# Altium PCB tsal_v1.PcbDoc
Units mm, origin at the board's own origin, x right, y up, seen from the top; angles counter-clockwise.
Board outline 175 x 18 mm, 2 copper layers (Top Layer, Bottom Layer); 41 components, 36 nets, 90 pads, 0 vias.
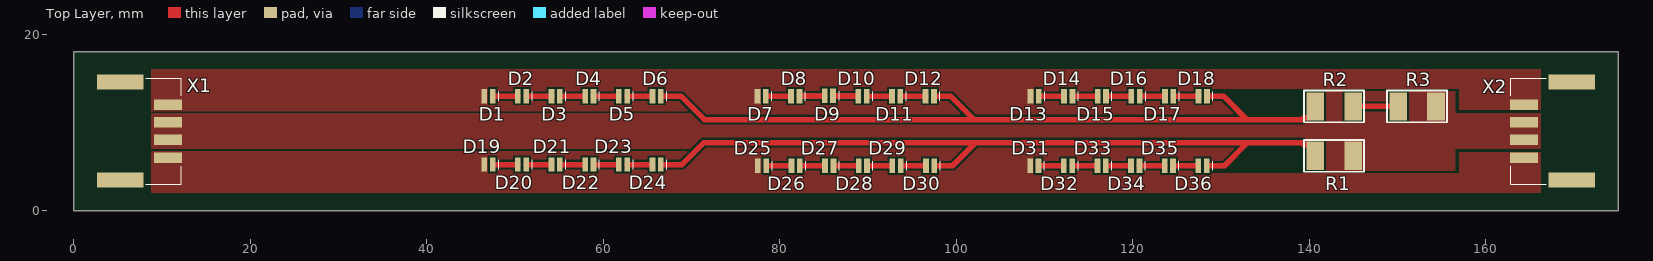
[diagram p0: Top Layer view]
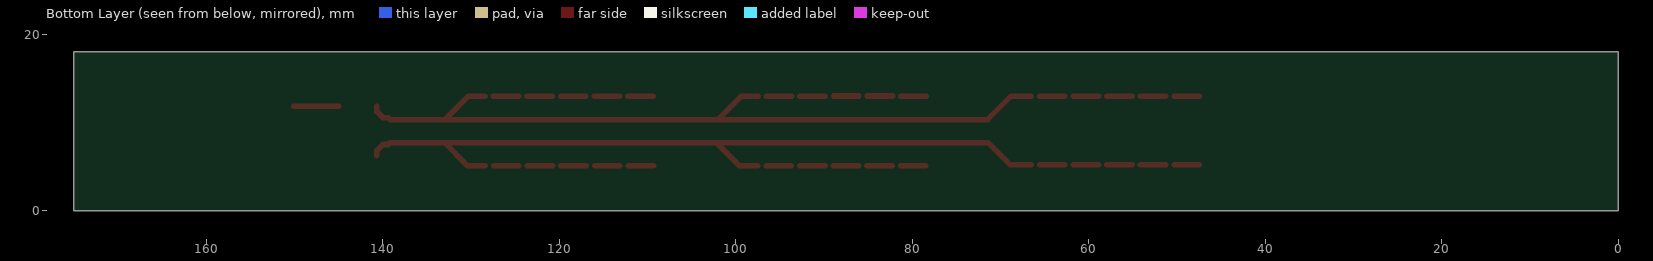
[diagram p1: Bottom Layer view, seen from below]

## Layer stack, top to bottom
Top Solder: solder mask 0.0102, Solder Resist, Dk 3.5
Top Layer: signal copper 0.0356
Dielectric 1: dielectric 0.32, FR-4, Dk 4.8
Bottom Layer: signal copper 0.0356
Bottom Solder: solder mask 0.0102, Solder Resist, Dk 3.5

## Board outline
0,0 175,0 175,18 0,18

## Design rules (kind name [scope] priority, off if disabled: settings)
Clearance Clearance_GND [InNamedPolygon('GND')] p1: gap=0.254 ignorepadtopadclearanceinfootprint=FALSE except(0: Arc-Hole Track-Hole SMDPad-Hole THPad-Hole Via-Hole Fill-Hole Poly-Hole Region-Hole Text-Hole)
Clearance [All] p2: gap=0.254 ignorepadtopadclearanceinfootprint=FALSE except(0: Arc-Hole Track-Hole SMDPad-Hole THPad-Hole Via-Hole Fill-Hole Poly-Hole Region-Hole Text-Hole)
MinimumSolderMaskSliver [All] p1: minsoldermaskwidth=0.095
PolygonConnect [All] p1: connectstyle=Direct reliefconductorwidth=0.254 reliefentries=4 polygonreliefangle="90 Angle" airgapwidth=0.254
RoomDefinition tsal_v1 [InComponentClass('tsal_v1')] p1 off: confinementstyle=ConfineIn formatcopy=TRUE lockcomponents=FALSE outline 1,1 174,1 174,17 1,17
RoutingVias [All] p1: holewidth=0.711 width=1.27 viastyle="Through Hole" minholewidth=0.711 minwidth=1.27 maxholewidth=0.711 maxwidth=1.27
SilkToSolderMaskClearance [IsPad] p1: minsilkscreentomaskgap=0.1 clearancetoexposedcopper=TRUE
SolderMaskExpansion SolderMaskExpansion_led [HasFootprint('led red 0606')] p1: expansion=0
SolderMaskExpansion [All] p2: expansion=0.102
Width [All] p1: maxlimit=0.635 minlimit=0.635 preferedwidth=0.635
28 further rules are at their usual default settings.

## Components (designator, comment, footprint, x,y, rotation, side; value= is the part's Value field where it differs from the comment)
D1 "LED XLAMP RED 1616 SMD" "led red 0606" 46.99,12.954 r0 top
D2 "LED XLAMP RED 1616 SMD" "led red 0606" 50.8,12.954 r0 top
D3 "LED XLAMP RED 1616 SMD" "led red 0606" 54.61,12.954 r0 top
D4 "LED XLAMP RED 1616 SMD" "led red 0606" 58.42,12.954 r0 top
D5 "LED XLAMP RED 1616 SMD" "led red 0606" 62.23,12.954 r0 top
D6 "LED XLAMP RED 1616 SMD" "led red 0606" 66.04,12.954 r0 top
D7 "LED XLAMP RED 1616 SMD" "led red 0606" 77.945,12.954 r0 top
D8 "LED XLAMP RED 1616 SMD" "led red 0606" 81.755,12.954 r0 top
D9 "LED XLAMP RED 1616 SMD" "led red 0606" 85.565,13 r0 top
D10 "LED XLAMP RED 1616 SMD" "led red 0606" 89.375,12.954 r0 top
D11 "LED XLAMP RED 1616 SMD" "led red 0606" 93.185,12.954 r0 top
D12 "LED XLAMP RED 1616 SMD" "led red 0606" 96.995,12.954 r0 top
D13 "LED XLAMP RED 1616 SMD" "led red 0606" 108.872,12.954 r0 top
D14 "LED XLAMP RED 1616 SMD" "led red 0606" 112.682,12.954 r0 top
D15 "LED XLAMP RED 1616 SMD" "led red 0606" 116.492,12.954 r0 top
D16 "LED XLAMP RED 1616 SMD" "led red 0606" 120.302,12.954 r0 top
D17 "LED XLAMP RED 1616 SMD" "led red 0606" 124.112,12.954 r0 top
D18 "LED XLAMP RED 1616 SMD" "led red 0606" 127.922,12.954 r0 top
D19 "LED XLAMP GREEN 1616 SMD" "led red 0606" 46.99,5.207 r0 top
D20 "LED XLAMP GREEN 1616 SMD" "led red 0606" 50.8,5.207 r0 top
D21 "LED XLAMP GREEN 1616 SMD" "led red 0606" 54.61,5.207 r0 top
D22 "LED XLAMP GREEN 1616 SMD" "led red 0606" 58.42,5.207 r0 top
D23 "LED XLAMP GREEN 1616 SMD" "led red 0606" 62.23,5.207 r0 top
D24 "LED XLAMP GREEN 1616 SMD" "led red 0606" 66.04,5.207 r0 top
D25 "LED XLAMP GREEN 1616 SMD" "led red 0606" 77.978,5.08 r0 top
D26 "LED XLAMP GREEN 1616 SMD" "led red 0606" 81.788,5.08 r0 top
D27 "LED XLAMP GREEN 1616 SMD" "led red 0606" 85.598,5.08 r0 top
D28 "LED XLAMP GREEN 1616 SMD" "led red 0606" 89.408,5.08 r0 top
D29 "LED XLAMP GREEN 1616 SMD" "led red 0606" 93.218,5.08 r0 top
D30 "LED XLAMP GREEN 1616 SMD" "led red 0606" 97.028,5.08 r0 top
D31 "LED XLAMP GREEN 1616 SMD" "led red 0606" 108.839,5.08 r0 top
D32 "LED XLAMP GREEN 1616 SMD" "led red 0606" 112.649,5.08 r0 top
D33 "LED XLAMP GREEN 1616 SMD" "led red 0606" 116.459,5.08 r0 top
D34 "LED XLAMP GREEN 1616 SMD" "led red 0606" 120.269,5.08 r0 top
D35 "LED XLAMP GREEN 1616 SMD" "led red 0606" 124.079,5.08 r0 top
D36 "LED XLAMP GREEN 1616 SMD" "led red 0606" 127.889,5.08 r0 top
R1 "RES SMD 6.8 OHM 1% 16W 2512" "R2512 pad under" 142.8,6.2 r180 top value=6.8R
R2 "RES SMD 10 OHM 1% 16W 2512" "R2512 pad under" 142.8,11.8 r180 top value=10R
R3 "RES SMD 10 OHM 1% 16W 2512" "R2512 pad under" 152.2,11.8 r180 top value=10R
X1 "Connector" 5023520400 10.69,11.001 r270 top
X2 "Connector" 5023520400 164.31,7.001 r90 top

## Footprints (in the part's own frame and the unit in brackets; to place one, negate y for a bottom-side part, rotate by r counter-clockwise, add the part's x,y. Pads: shape width x height; smd on the part's side, far side on the other; paste and mask are expansions set on the pad)
5023520400 [mm] "Molex DuraClik, 4 pos, Right Angle"
  rect 1.7x5.3 smd mask+0: 0(-3.55,-5.4) 0(7.55,-5.4)
  rect 1.2x3.2 smd mask+0: 1(-1,0) 2(1,0) 3(3,0) 4(5,0)
  silkscreen extent -4,-2.5 8,1.5, body extent -4,-10.69 8,1, height 6.8
"led red 0606" [mm]
  rect 0.65x1.6 smd: 1(-0.475,0) 2(0.475,0)
  silkscreen extent 1.14,-0.53 1.14,0.53, body extent -0.8,-0.8 0.8,0.8, height 1.09
"R2512 pad under" [mm]
  rect 2x3.2 smd: 1(-2.15,0) 2(2.15,0)
  silkscreen extent -3.4,-1.8 3.4,1.8, body extent -3.05,-1.52 3.05,1.52, height 0.7

## Part data
D1 D2 D3 D4 D5 D6 D7 D8 D9 D10 D11 D12 D13 D14 D15 D16 D17 D18: library part XQARED-02-0000-000000W01, "LED Lighting Color Xlamp® XQ-A Red 625nm (620nm ~ 630nm) 0606 (1616 Metric)", Manufacturer="Comchip Technology", Supplier Part Number 1=XQARED-02-0000-000000W01CT-ND, Part_Number=XQARED-02-0000-000000W01, Price=0.81, Price_10=0.762, Supplier 1=Digi-Key, Supplier_Link=https://www.digikey.ca/product-detail/en/cree-inc/XQARED-02-0000-000000W01/XQARED-02-0000-000000W01CT-ND/5806748
D19 D20 D21 D22 D23 D24 D25 D26 D27 D28 D29 D30 D31 D32 D33 D34 D35 D36: library part XQAGRN-02-0000-000000Z01, "LED Lighting Color Xlamp® XQ-A Green 528nm (520nm ~ 535nm) 0606 (1616 Metric)", Manufacturer="Comchip Technology", Supplier Part Number 1=XQAGRN-02-0000-000000Z01CT-ND, Part_Number=XQAGRN-02-0000-000000Z01, Price=0.87, Price_10=0.817, Supplier 1=Digi-Key, Supplier_Link=https://www.digikey.ca/product-detail/en/cree-inc/XQAGRN-02-0000-000000Z01/XQAGRN-02-0000-000000Z01CT-ND/5806746
R1: library part "RES 2512 6.8R 1% 16W", "6.8 Ohms ±1% 16W Chip Resistor 2512 (6432 Metric) Moisture Resistant Thin Film", Manufacturer=Susumu, Power=16W, Supplier Part Number 1=CPA25Q6.8CT-ND, Tolerance=1%, Part_Number=CPA25Q6.8CT, Supplier 1=Digi-Key, Supplier_Link=https://www.digikey.com/product-detail/en/susumu/CPA2512Q6R80FS-T10/CPA25Q6.8CT-ND/1935961
R2 R3: library part "RES 2512 10R 1% 16W", "10 Ohms ±1% 16W Chip Resistor 2512 (6432 Metric) Moisture Resistant Thin Film", Manufacturer=Susumu, Power=16W, Supplier Part Number 1=CPA25Q10.0CT-ND, Tolerance=1%, Part_Number=CPA25Q10.0CT, Supplier 1=Digi-Key, Supplier_Link=https://www.digikey.com/product-detail/en/susumu/CPA2512Q10R0FS-T10/CPA25Q10.0CT-ND/1935963
X1 X2: library part 5023520400, "Molex DuraClik, 4 pos, RA", Manufacturer=Molex, Supplier Part Number 1=WM7171CT-ND, Mounting_Type="Surface Mount, Right Angle", Part_Number=5023520400, Part_Number_Crimp=0502128000, Part_Number_Mating=5023510400, Series=DuraClik, Supplier 1=Digikey, Supplier_Link=http://www.digikey.com/product-detail/en/molex-llc/5023520400/WM7171CT-ND/3045198, Supplier_Link_Crimp=http://www.digikey.com/product-detail/en/molex-llc/0502128000/WM4561CT-ND/2524899, Supplier_Link_Mating=http://www.digikey.com/product-detail/en/molex-llc/5023510400/WM8688-ND/3045219

## Nets (pads, with @x,y where several pads share a name; then routed paths per layer and width w, separated by ;. In a path a pad name is that pad's centre, name@x,y a point inside that pad or via, vN(x,y) a via of type N, cw(c..) or ccw(c..) an arc to the next point about the centre after c; other vN are vias at no path point)
"24V GREEN": D19.1 D25.1 D31.1 X1.4 X2.1
"24V RED": D1.1 D7.1 D13.1 X1.1 X2.4
GND: R1.1 R3.1 X1.2 X1.3 X2.2 X2.3
NetD1_2: D1.2 D2.1 | length 2.9
  Top Layer w0.635: D1.2 D2.1
NetD2_2: D2.2 D3.1 | length 2.9
  Top Layer w0.635: D2.2 D3.1
NetD3_2: D3.2 D4.1 | length 2.9
  Top Layer w0.635: D3.2 D4.1
NetD4_2: D4.2 D5.1 | length 2.9
  Top Layer w0.635: D4.2 D5.1
NetD5_2: D5.2 D6.1 | length 2.9
  Top Layer w0.635: D5.2 D6.1
NetD6_2: D6.2 D12.2 D18.2 R2.2 | length 87.4
  Top Layer w0.635: D6.2 68.8,12.954 71.454,10.3 102,10.3 ; D12.2 99.346,12.954 102,10.3 ; D18.2 130.246,12.954 132.9,10.3 ; R2.2 140.65,11.2 139.967,10.517 139.367,10.517 139.15,10.3 132.9,10.3 ; 102,10.3 132.9,10.3
NetD7_2: D7.2 D8.1 | length 2.9
  Top Layer w0.635: D7.2 D8.1
NetD8_2: D8.2 D9.1 | length 2.9
  Top Layer w0.635: D8.2 82.23,12.97 82.238,12.977 85.082,12.977 85.09,12.985 D9.1
NetD9_2: D9.2 D10.1 | length 2.9
  Top Layer w0.635: D9.2 86.04,12.985 86.048,12.977 88.892,12.977 88.9,12.97 D10.1
NetD10_2: D10.2 D11.1 | length 2.9
  Top Layer w0.635: D10.2 D11.1
NetD11_2: D11.2 D12.1 | length 2.9
  Top Layer w0.635: D11.2 D12.1
NetD13_2: D13.2 D14.1 | length 2.9
  Top Layer w0.635: D13.2 D14.1
NetD14_2: D14.2 D15.1 | length 2.9
  Top Layer w0.635: D14.2 D15.1
NetD15_2: D15.2 D16.1 | length 2.9
  Top Layer w0.635: D15.2 D16.1
NetD16_2: D16.2 D17.1 | length 2.9
  Top Layer w0.635: D16.2 D17.1
NetD17_2: D17.2 D18.1 | length 2.9
  Top Layer w0.635: D17.2 D18.1
NetD19_2: D19.2 D20.1 | length 2.9
  Top Layer w0.635: D19.2 D20.1
NetD20_2: D20.2 D21.1 | length 2.9
  Top Layer w0.635: D20.2 D21.1
NetD21_2: D21.2 D22.1 | length 2.9
  Top Layer w0.635: D21.2 D22.1
NetD22_2: D22.2 D23.1 | length 2.9
  Top Layer w0.635: D22.2 D23.1
NetD23_2: D23.2 D24.1 | length 2.9
  Top Layer w0.635: D23.2 D24.1
NetD24_2: D24.2 D30.2 D36.2 R1.2 | length 87.6
  Top Layer w0.635: D24.2 68.907,5.207 71.4,7.7 102.2,7.7 ; D30.2 99.58,5.08 102.2,7.7 ; D36.2 130.38,5.08 133,7.7 ; R1.2 140.65,6.8 139.967,7.483 139.367,7.483 139.15,7.7 133,7.7 ; 102.2,7.7 133,7.7
NetD25_2: D25.2 D26.1 | length 2.9
  Top Layer w0.635: D25.2 D26.1
NetD26_2: D26.2 D27.1 | length 2.9
  Top Layer w0.635: D26.2 D27.1
NetD27_2: D27.2 D28.1 | length 2.9
  Top Layer w0.635: D27.2 D28.1
NetD28_2: D28.2 D29.1 | length 2.9
  Top Layer w0.635: D28.2 D29.1
NetD29_2: D29.2 D30.1 | length 2.9
  Top Layer w0.635: D29.2 D30.1
NetD31_2: D31.2 D32.1 | length 2.9
  Top Layer w0.635: D31.2 D32.1
NetD32_2: D32.2 D33.1 | length 2.9
  Top Layer w0.635: D32.2 D33.1
NetD33_2: D33.2 D34.1 | length 2.9
  Top Layer w0.635: D33.2 D34.1
NetD34_2: D34.2 D35.1 | length 2.9
  Top Layer w0.635: D34.2 D35.1
NetD35_2: D35.2 D36.1 | length 2.9
  Top Layer w0.635: D35.2 D36.1
NetR2_1: R2.1 R3.2 | length 5.1
  Top Layer w0.635: R2.1 R3.2
pads on no net: X1.0 X2.0

## Polygon pours and split planes (outlines as drawn)
GND on Top Layer "Top Layer-GND 1" (solid, pour order 16): 136.6,11 139.55,11 139.55,13.5 156.5,13.5 156.5,4.5 139.55,4.5 139.55,7 136.6,7
"24V RED" on Top Layer "Top Layer-24V RED" (solid, pour order 10): 8.8,13.4 128.4,13.4 128.4,16 8.8,16
no net on Top Layer "Top Layer-No Net 1" (solid, pour order 32): 45.9,13.6
no net on Top Layer "Top Layer-No Net 2" (solid, pour order 28): 45.974,13.9
"24V GREEN" on Top Layer "Top Layer-24V GREEN" (solid, pour order 14): 8.8,4.2 23,4.2 137.4,4.2 137.4,2 8.8,2
"24V GREEN" on Top Layer "Top Layer-24V GREEN 2" (solid, pour order 22): 137.4,4.2 139.4,4.2 157,4.2 157,3.451 157,6.6 166.2,6.6 166.2,2 137.4,2
"24V GREEN" on Top Layer "Top Layer-24V GREEN 1" (solid, pour order 26): 8.8,7.1 131.7,7.1 128.5,3.9 8.8,3.9
"24V RED" on Top Layer "Top Layer-24V RED 1" (solid, pour order 24): 8.8,14.04 8.8,10.9 131.5,10.9 128.36,14.04
GND on Top Layer "Top Layer-GND" (solid, pour order 6): 8.8,11 23.4,11 41.2,11 137.4,11 137.4,7 8.8,7
"24V RED" on Top Layer "Top Layer-24V RED 2" (solid, pour order 20): 128.1,13.8 157,13.8 157,11.4 166.2,11.4 166.2,16 128.1,16
GND on Top Layer "Top Layer-GND 2" (solid, pour order 18): 166.2,11 156.1,11 156.1,7 166.2,7
no net on Top Layer "Top Layer-No Net" (solid, pour order 12): 8.8,6.6